# Altium PCB B45160514D.PCBDOC (part 2 of 2)
Units mil, origin at the board's own origin, x right, y up, seen from the top; angles counter-clockwise.
Board outline 6000 x 4000 mil, 2 copper layers (Top Layer, Bottom Layer); 126 components, 91 nets, 371 pads, 466 vias.
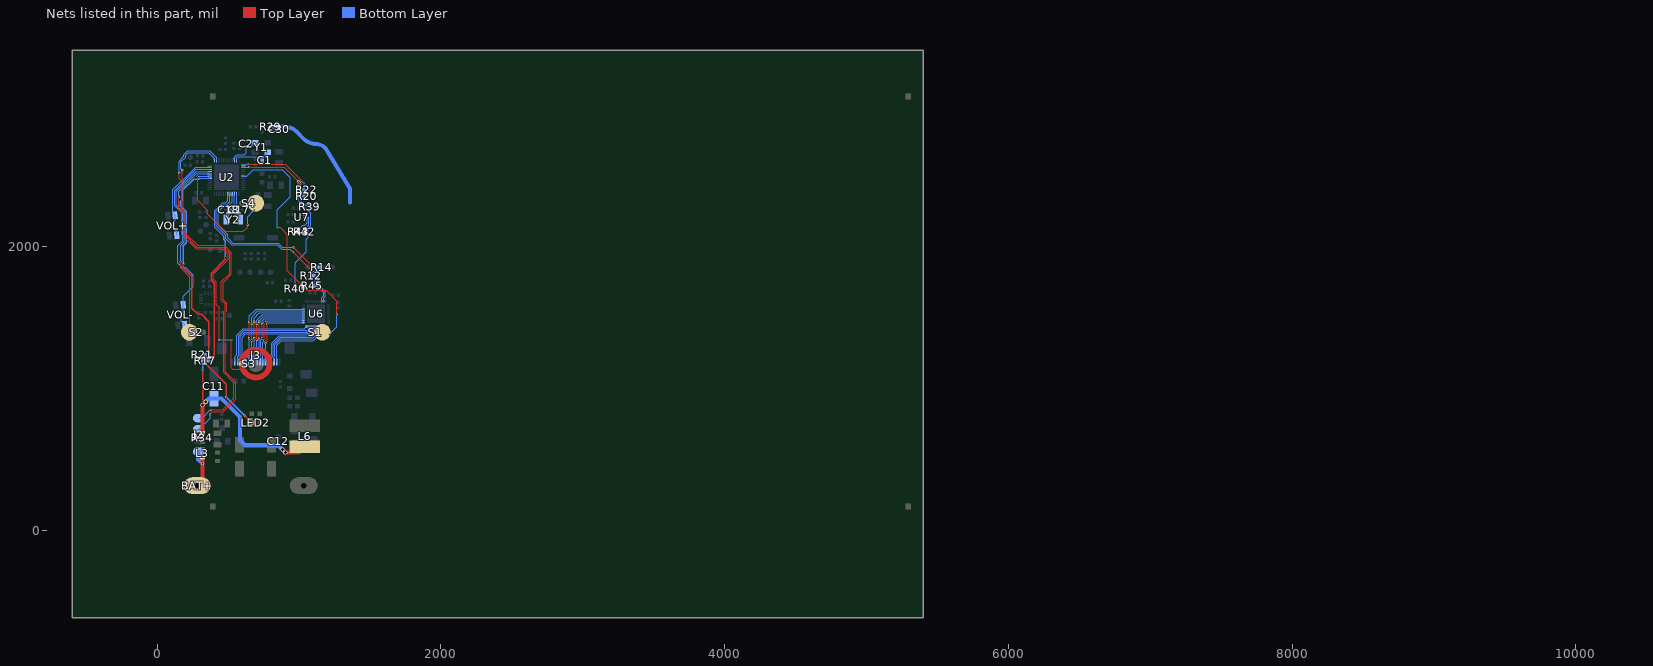
[diagram p2: the nets of this part, all layers, seen from the top]

## Via types
v1: diameter 15, hole 10, Top Layer to Bottom Layer, tented both sides, 447 vias
v2: diameter 30, hole 20, Top Layer to Bottom Layer, tented both sides, 15 vias
v3: diameter 19.68, hole 11.81, Top Layer to Bottom Layer, tented both sides, 4 vias

## Nets (pads, with @x,y where several pads share a name; then routed paths per layer and width w, separated by ;. In a path a pad name is that pad's centre, name@x,y a point inside that pad or via, vN(x,y) a via of type N, cw(c..) or ccw(c..) an arc to the next point about the centre after c; other vN are vias at no path point) (continued)
NetR42_2: R42.2 U7.C3 | length 133.5
  Bottom Layer w6: U7.C3@1034.5,2221.75 1052.25,2221.75 1070,2204 1070,2153 R42.2@1042,2125
NetR43_2: R43.2 U7.B3 | length 135.6
  Bottom Layer w6: R43.2@997,2125 1025,2153 1042,2153 1058,2169 1058,2199 1051,2206 U7.B3@1034.5,2206
RED: LED2.2 U2.18 | length 2131.6
  Top Layer w10: v1(185,1877) 185,1851.7 245,1791.7 245,1566.7 288.71,1523 315,1523 365.3,1472.7 365.3,1227.3 344,1206 344,1174 486.87,1031.13 v1(486.87,939.87) ; v1(615,811.73) LED2.2@668.03,758.7
  Bottom Layer w8: 300.82,2482.13 U2.18@371.89,2482.13
  Bottom Layer w10: v1@185,1878 185,2008 206.3,2029.3 206.3,2245 163.7,2287.6 163.7,2317.01 178.7,2332.01 178.7,2397.01 256.69,2475 293.69,2475 300.82,2482.13 ; v1(486.87,939.87) v1(615,811.73)
RF: C30.1 R29.2 | length 845.8
  Bottom Layer w27.56: R29.2@820,2846 897,2846 cw(c897,2725.29) 982.36,2810.64 1033.64,2759.36 ccw(c1119,2844.71) 1119,2724 cw(c1119,2632.26) 1183.87,2697.13 1359,2412 1359,2312
RSTB: R14.1 U2.4 U6.31 | length 1384.6
  Top Layer w6: v1(961,1996) 1102,1855 v1(1116,1855)
  Bottom Layer w6: U2.4@529.37,2371.89 529.37,2317.37 497,2285 470.19,2285 430,2244.81 430,2151 498,2083 498,2062 534,2026 853,2026 883,1996 v1(961,1996) ; v1(1116,1855) 1137,1855 1137,1730.24 1186,1681.24 1186,1648.24 1175.12,1637.36 U6.31@1175.12,1614.8
RX0: J3.2 U6.11 | length 709.1
  Bottom Layer w6: J3.2@547.96,1187.57 547.96,1222.27 562.7,1237.01 562.7,1377.01 608.7,1423.01 1036.45,1423.01 U6.11@1051.1,1437.66
RX1: J3.3 U6.10 | length 715.6
  Bottom Layer w6: J3.3@567.65,1187.57 567.65,1224.65 574.7,1231.7 574.7,1372.01 612.93,1410.24 1056,1410.24 1064.88,1419.12 U6.10@1064.88,1437.66
RX2: J3.4 U6.9 | length 714.9
  Bottom Layer w6: J3.4@587.33,1187.57 587.34,1367.65 617.93,1398.24 1064,1398.24 1078.66,1412.9 U6.9@1078.66,1437.66
RX3: J3.5 U6.8 | length 720.3
  Bottom Layer w6: J3.5@606.98,1187.57 606.98,1222 599.7,1229.28 599.7,1363.01 622.93,1386.24 1072,1386.24 1092.44,1406.68 U6.8@1092.44,1437.66
RX4: J3.14 U6.7 | length 511.9
  Bottom Layer w6: J3.14@784.15,1187.53 784.15,1219.15 806.7,1241.7 806.7,1319.01 861.7,1374.01 1080.77,1374.01 1106.22,1399.46 U6.7@1106.22,1437.66
RX5: J3.15 U6.6 | length 510
  Bottom Layer w6: J3.15@803.83,1187.53 803.83,1218.83 818.7,1233.7 818.7,1314.01 866.7,1362.01 1086.77,1362.01 1120,1395.24 U6.6@1120,1437.66
RX6: J3.16 U6.5 | length 508.7
  Bottom Layer w6: J3.16@823.52,1187.53 823.52,1221 830.7,1228.18 830.7,1309.01 871.7,1350.01 1093.77,1350.01 1133.78,1390.02 U6.5@1133.78,1437.66
RX7: J3.17 U6.4 | length 506.7
  Bottom Layer w6: J3.17@843.2,1187.53 843.21,1304.21 876.24,1337.24 1099,1337.24 1147.56,1385.8 U6.4@1147.56,1437.66
S1: S1.1 U2.42 | length 1802.4
  Top Layer w6: v1(848,2136) 867,2136 918,2085 918,1830 1055,1693 1190.5,1693 1267,1616.5 v1(1267,1521)
  Bottom Layer w6: U2.42@608.11,2497.87 631.87,2497.87 678,2544.01 882,2544.01 939,2487 939,2351.7 848,2260.7 v1(848,2136) ; v1(1212.5,1382.5) 1267,1437 v1(1267,1521)
S2: S2.1 U2.21 | length 1302.8
  Top Layer w6: v1(165,1894) 165,1851 230.7,1785.3 230.7,1449.3 S2.1@235,1445
  Bottom Layer w6: v1(165,1894) 165,2008.31 192,2035.31 192,2237.91 136,2293.91 136,2391.31 274.07,2529.37 U2.21@371.89,2529.37
S3: S3.2 U2.20 | length 1993.1
  Top Layer w6: v1(154,2352) 154,2263 174.7,2242.3 174.7,2085.3 275,1985 462.71,1985 500,1947.7 500,1910 394.7,1804.7 394.7,1771.01 417.7,1748.01 417.7,1592.54 436.5,1573.74 v1(436.5,1342.74) ; v1(524,1342.74) 524,1146 534,1136 597,1136
  Bottom Layer w6: v1(154,2352) 154,2392 275.62,2513.62 U2.20@371.89,2513.62 ; v1(436.5,1342.74) v1(524,1342.74)
S4: S4.1 U2.19 | length 867.2
  Top Layer w6: v1(285,2494) 285,2327 358,2254 358,2230 480,2108 609,2108 639,2138 v1(639,2154)
  Bottom Layer w6: v1(285,2494) 288.87,2497.87 U2.19@371.89,2497.87 ; v1(639,2154) 639,2212 v1(686,2259)
SWDCLK: J2.2 U2.25 | length 2665.5
  Top Layer w6: v1(177,2539) 177,2474 185,2466 185,2267.7 199.3,2253.41 199.3,2094.7 285,2009 472.54,2009 524.3,1957.24 524.3,1805.61 466,1747.31 466,1627.7 492.23,1601.48 492.23,1550 480.87,1538.65 480.87,1119.13 554,1046 554,925.31 464.69,836 390,836 v1(373,819)
  Bottom Layer w6: v1(177,2539) 168,2548 168,2598.31 201,2631.31 201,2644.31 219.69,2663 364.91,2663 403.39,2624.52 U2.25@403.39,2608.11 ; J2.2@294.61,713.61 373,792 v1(373,819)
SWDIO: J2.1 U2.26 | length 2646.4
  Top Layer w6: v1(156,2519) 156,2477.7 172.3,2461.41 172.3,2262.7 187,2248 187,2089.88 279.95,1996.94 467.77,1996.94 512,1952.7 512,1810.31 453.7,1752.01 453.7,1623.01 480.21,1596.49 480.21,1555.05 468.81,1543.65 468.81,1114.19 542,1041 542,930.31 461.7,850.01 v1(376,850.01)
  Bottom Layer w6: v1(156,2519) 156,2604 188.75,2636.75 188.75,2649.06 214.69,2675 370,2675 419.13,2625.87 U2.26@419.13,2608.11 ; J2.1@291.94,792.35 318.35,792.35 v1(376,850.01)
T_I2C_SCL: R20.2 R39.2 U2.37 | length 685.5
  Top Layer w6: v1(641,2582) 902,2582 1012,2472 v1(1012,2444)
  Bottom Layer w6: U2.37@608.11,2576.61 635.61,2576.61 v1(641,2582) ; 1012,2355 R20.2@1036,2355 ; v1(1012,2444) 1012,2324.7 1043.27,2293.43 R39.2@1061.56,2293.43
T_I2C_SDA: R22.2 R40.2 U2.38 | length 1339.4
  Top Layer w6: v1(649,2560.87) 895.13,2560.87 v1(995,2461)
  Bottom Layer w6: U2.38@608.11,2560.87 v1(649,2560.87) ; R40.2@975,1724 975,1888.7 1051.7,1965.4 1051.7,2051.09 1065.7,2065.09 1065.7,2131.4 1082.7,2148.4 1082.7,2237.01 995,2324.7 v1(995,2461) 1021,2461 1036,2446 R22.2@1036,2400
"TOUCH INT": R12.1 R45.1 U2.5 U6.30 | length 1355.1
  Top Layer w6: v1(957.22,1962.78) v1@1101.5,1818.5
  Bottom Layer w6: U2.5@513.62,2371.89 513.62,2318.5 492.13,2297 465.22,2297 417.7,2249.48 417.7,2146.33 485,2079.03 485,2055 526,2013.99 847.71,2013.99 878.71,1983 937,1983 v1(957.22,1962.78) ; v1(1104,1821) R12.1@1104,1795 1114,1785 1114,1735.7 1174,1675.7 1174,1653.31 1161.34,1640.64 U6.30@1161.34,1614.8
TX0: J3.13 U6.12 | length 533.4
  Top Layer w6: v1(764.46,1320) 775,1330.54 v1(775,1458)
  Bottom Layer w6: J3.13@764.46,1187.53 v1(764.46,1320) ; v1@775,1459 780.23,1464.23 U6.12@1031.42,1464.21
TX1: J3.12 U6.13 | length 564.7
  Top Layer w6: v1(757,1340) v1(757,1469)
  Bottom Layer w6: J3.12@744.74,1187.53 744.74,1327.74 v1(757,1340) ; v1(757,1469) 766.01,1478.01 U6.13@1031.42,1477.99
TX2: J3.11 U6.14 | length 593.2
  Top Layer w6: v1(740,1353) v1(740,1455)
  Bottom Layer w6: J3.11@725.09,1187.57 725.09,1223.09 732,1230 732,1345 v1(740,1353) ; v1(740,1455) 740,1477 754.79,1491.79 U6.14@1031.42,1491.77
TX3: J3.10 U6.15 | length 619.5
  Top Layer w6: v1(719,1357) v1@719,1471
  Bottom Layer w6: J3.10@705.41,1187.57 705.41,1220.41 719,1234 v1(719,1357) ; v1(720,1471) 720,1479 746.57,1505.57 U6.15@1031.42,1505.57
TX4: J3.9 U6.16 | length 644.5
  Top Layer w6: v1(702,1343) v1@702,1455
  Bottom Layer w6: J3.9@685.72,1187.57 685.72,1222.72 702,1239 v1(702,1343) ; v1(702,1456) 702,1481 740.35,1519.35 U6.16@1031.42,1519.33
TX5: J3.8 U6.17 | length 678.7
  Top Layer w6: v1(684.7,1356) v1(684.7,1471)
  Bottom Layer w6: J3.8@666.04,1187.57 666.04,1221.04 684.7,1239.7 v1(684.7,1356) ; v1(684.7,1471) 684.7,1496.7 721.13,1533.13 U6.17@1031.42,1533.11
TX6: J3.7 U6.18 | length 706.6
  Top Layer w6: v1(667,1339) v1(667,1456)
  Bottom Layer w6: J3.7@646.35,1187.57 646.35,1220.35 667,1241 v1(667,1339) ; v1(667,1456) 667,1503 710.91,1546.91 U6.18@1031.42,1546.89
TX7: J3.6 U6.19 | length 736.3
  Top Layer w6: v1(649,1355) v1(649,1470)
  Bottom Layer w6: J3.6@626.67,1187.57 626.67,1217.68 649,1240 v1(649,1355) ; v1(649,1470) 649,1512 697.69,1560.69 U6.19@1031.42,1560.67
VCC: C11.1 C12.1 L6.1 R17.1 R34.1 | length 1568.3
  Top Layer w10: v2(320,885) v2@321,884 ; v1(321,1131) 321,926.52 v2@341.32,906.2
  Top Layer w30: R34.1@320,685 v2(320,885) v2(342.68,907.68) ; v2(883.66,570.34) v2(904,550) 998.82,550 L6.1@1040,591.18
  Bottom Layer w10: v1(321,1131) R17.1@321,1195
  Bottom Layer w30: v2(320,885) 365.35,930.35 453.65,930.35 585,799 585,636 621,600 854,600 v2(904,550)
VDD: BAT+.1 J2.4 L3.2 | length 325.3
  Top Layer w30: BAT+.1@282.2,316.26 305.06,316.3 320,331.24 L3.2@320,515
  Bottom Layer w30: J2.4@290,556.13 290,501 v3(320,471)
VOL+: U2.23 VOL+.3 VOL+.4 | length 668.7
  Bottom Layer w6: VOL+.3@138.67,2080.87 138.67,2108.33 114,2133 114,2173 126.32,2185.32 VOL+.4@126.32,2222.07 111.3,2237.08 111.3,2401.3 270.87,2560.87 U2.23@371.89,2560.87
VOL-: U2.22 VOL-.3 VOL-.4 | length 1395.4
  Bottom Layer w6: VOL-.3@195.67,1450.87 172,1474.54 172,1543 183.32,1554.32 183.32,1650.32 255,1722 255,1799 198,1856 175,1856 146,1885 146,2006.31 179.7,2040.01 179.7,2233.3 123.3,2289.7 123.3,2395.61 272.81,2545.12 U2.22@371.89,2545.12
VOLTAGE: R17.2 R21.2 U2.6 | length 1396.4
  Top Layer w10: v1(385,1196.24) 403.7,1214.94 403.7,1742.01 380,1765.7 380,1810.25 482,1912.25 v1(482,1927)
  Bottom Layer w6: 469,2075 405.7,2138.3 405.7,2255.01 462,2311.3 484.3,2311.3 497.87,2324.87 U2.6@497.87,2371.89
  Bottom Layer w10: R21.2@339,1240 359,1220 R17.2@359,1195 ; R17.2@360.24,1196.24 v1(385,1196.24) ; 469,2075 469,2051 482,2038 v1(482,1927)
XC1: C1.1 U2.35 Y1.1 | length 290
  Bottom Layer w6: U2.35@560.87,2608.11 560.87,2630.87 565,2635 716,2635 C1.1@741,2610 741,2631 776.54,2666.54 Y1.1@780.28,2666.54
XC2: C2.1 U2.34 Y1.2 | length 234.6
  Bottom Layer w6: U2.34@545.12,2608.11 545.12,2632.12 560,2647 616,2647 630,2661 630,2702 637,2709 665.26,2709 Y1.2@689.72,2733.46
XL1: C17.1 U2.2 Y2.1 | length 191
  Bottom Layer w6: U2.2@560.87,2371.89 560.87,2233.13 585.21,2208.79 Y2.1@585.21,2191
XL2: C18.1 U2.3 Y2.2 | length 177.8
  Bottom Layer w6: Y2.2@497,2214 523,2240 523,2258 545.12,2280.12 U2.3@545.12,2371.89
pads on no net: MARK1.1 MARK1.4 MARK2.1 MARK2.4 MARK3.1 MARK3.4 MARK4.1 MARK4.4 MARK5.1 MARK5.4 MARK6.1 MARK6.4 MARK7.1 MARK7.4 MARK8.1 MARK8.4 U2.11 U2.12 U2.29 U2.39 U2.40 U2.43 U2.44 U4.2 U4.3 U4.9 U4.10 U4.11 U4.12 U6.0@1009.76,1505.55 U6.0@1009.76,1574.45 U6.0@1064.88,1415.98 U6.0@1092.44,1636.46 U6.0@1133.78,1415.98 U6.0@1161.34,1636.46 U6.0@1230.24,1491.77 U6.0@1230.24,1560.67 U6.1 U6.2 U6.3 U6.35 U6.36 U6.37 U6.38 U6.39 U6.40 U6.41 U6.42 U7.A3

## Polygon pours and split planes (outlines as drawn)
GND on Top Layer "Top Layer-GND" (hatched 45Degree grid 40 track 6, remove dead copper, pour order 1000): 853,1745 1332,1745 1332,1092 517,1092 380.66,1228.34 380.66,1355.84 769.82,1745
GND on Top Layer "GND" (solid, remove dead copper, pour order 1000): 650,2992 649,2991 388,2991 0,2603 -5,2598 -5,238 -6,237 1191,237 1192,238 1190,240 1190,874 1264,948 1261,951 1261,1103 962.25,1103 955.12,1110.13 954.99,1110 884.09,1110 878.14,1104.05 507.95,1104.05 381,1231 370,1242 370,1354 390,1354 617,1581 763,1727 1406,1727 1406,2613 1027,2992
GND on Bottom Layer "bot Layer-GND" (hatched 90Degree grid 40 track 5.98, remove dead copper, pour order 1000): 865,1747 1344,1747 1344,1094 529,1094 392.66,1230.34 392.66,1357.84 781.82,1747
GND on Bottom Layer "GND" (solid, remove dead copper, pour order 1001): 650,2992 649,2991 388,2991 0,2603 -5,2598 -5,238 -6,237 1191,237 1192,238 1190,240 1190,874 1264,948 1261,951 1261,1103 962.25,1103 955.12,1110.13 954.99,1110 884.09,1110 878.14,1104.05 507.95,1104.05 381,1231 370,1242 370,1354 390,1354 617,1581 763,1727 1406,1727 1406,2613 1027,2992

## Keep-outs
Bottom Layer:
  circle w5: c183.13,1759.5 r59.05
  circle w5: c1208.02,1759.5 r59.05
Keep-Out Layer:
  circle w5: c4480.42,1759.5 r35.43
  circle w5: c5505.31,1759.5 r35.43
  circle w5: c3047.99,1759.5 r35.43
  circle w5: c4072.88,1759.5 r35.43
  circle w5: c1615.56,1759.5 r35.43
  circle w5: c2640.45,1759.5 r35.43
  circle w5: c1208.02,1759.5 r35.43
  circle w5: c183.13,1759.5 r35.43
  circle w5: c5492.15,3109.69 r59.06
  circle w5: c196.85,3109.68 r59.06
  circle w5: c5492.15,118.14 r59.06
  circle w5: c196.85,118.13 r59.06
  circle w5: c183.13,1759.5 r35.43
  circle w5: c1208.02,1759.5 r35.43
  circle w5: c183.13,1759.5 r35.43
  circle w5: c1208.02,1759.5 r35.43
  lines w5: 49.06,2159.45 73.19,2162.14 ; 51.87,2128.31 76,2131 ; 106.06,1529.45 130.19,1532.14 ; 108.87,1498.31 133,1501 ; 120.59,1368.61 44.36,2212.63 ; 201.2,2991.58 1191.07,2991.58 ; 799,2991.58 5689,2991.58 5689,3188.45 ccw(c5649.63,3188.45) 5649.63,3227.82 4772.23,3227.82 39.37,3227.8 ccw(c39.37,3188.43) 0,3188.43 0,2991.57 4861.83,2991.57 ; 827.17,236.25 5689,236.25 5689,39.38 cw(c5649.63,39.38) 5649.63,0.01 916.77,0.01 39.37,0 cw(c39.37,39.37) 0,39.37 0,236.24 4890,236.24 ; 1478.56,2193.04 1479.97,2177.35 ; 1480.15,2175.39 1480.33,2173.43 ; 1480.86,2167.55 1481.28,2162.84 ; 1484.68,2125.2 1485.11,2120.5 ; 1485.64,2114.61 1485.82,2112.65 ; 1485.99,2110.69 1487.41,2095.01 ; 1633.06,236.24 2622.94,236.24 ; 1633.63,2991.58 2623.5,2991.58 ; 1720,236.24 2622.94,236.24 ; 2910.99,2193.04 2912.4,2177.35 ; 2912.58,2175.39 2912.76,2173.43 ; 2913.29,2167.55 2913.72,2162.84 ; 2917.12,2125.2 2917.54,2120.5 ; 2918.07,2114.61 2918.25,2112.65 ; 2918.43,2110.69 2919.84,2095.01 ; 3065.5,236.24 4055.37,236.24 ; 3066.06,2991.58 4055.94,2991.58 ; 3129,236.24 4055.37,236.24 ; 4343.42,2193.04 4344.84,2177.35 ; 4345.01,2175.39 4345.19,2173.43 ; 4345.72,2167.55 4346.15,2162.84 ; 4349.55,2125.2 4349.97,2120.5 ; 4350.5,2114.61 4350.68,2112.65 ; 4350.86,2110.69 4352.27,2095.01 ; 4497.93,236.24 5487.8,236.24 ; 4566,236.24 5487.8,236.24 ; 44.36,2212.63 44.36,2212.64 ; 44.36,2212.63 99.37,2568.75 ; 44.36,2212.63 131.4,1248.88 183.76,1248.88 cw(c183.76,1176.04) 183.76,1103.21 153.25,1103.21 169.8,919.93 ; 44.36,2212.63 99.37,2568.75 ; 44.36,2212.63 44.36,2212.64 ; 44.36,2212.64 44.36,2212.64 ; 44.36,2212.64 44.36,2212.64 ; 99.37,2568.75 190,2716.72 ; 99.37,2568.75 190,2716.72 ; 169.8,919.93 ccw(c189.41,921.7) 185.18,902.47 ; 169.8,919.93 ccw(c189.41,921.7) 185.18,902.47 ; 169.8,919.93 ccw(c189.41,921.7) 185.18,902.47 ; 169.8,919.93 154.24,1092.19 169.8,919.93 ; 177.01,236.24 177.01,413.4 ; 177.01,236.24 1190.51,236.24 ; 177.01,236.24 177.01,413.4 ; 177.01,236.24 1190.51,236.24 ; 177.01,236.24 1190.51,236.24 ; 177.01,236.24 177.01,413.4 ; 177.01,413.4 ccw(c161.26,449.49) 200.63,449.49 ; 177.01,413.4 ccw(c161.26,449.49) 200.63,449.49 ; 177.01,413.41 ccw(c161.26,449.49) 200.63,449.49 ; 177.01,413.4 ccw(c161.26,449.49) 200.63,449.49 ; 185.18,902.47 cw(c180.95,883.25) 200.63,883.25 ; 185.18,902.47 cw(c180.95,883.25) 200.63,883.25 ; 185.18,902.47 cw(c180.95,883.25) 200.63,883.25 ; 190,2716.72 cw(c257.15,2675.6) 266.96,2753.72 ; 190,2716.72 cw(c257.15,2675.6) 266.96,2753.72 ; 200.63,236.24 1190.51,236.24 ; 200.63,236.24 1190.51,236.24 ; 200.63,236.24 1190.51,236.24 ; 200.63,236.24 1190.51,236.24 ; 200.63,449.49 200.63,883.25 ; 200.63,449.49 200.63,883.25 ; 200.63,449.49 200.63,883.25 ; 266.96,2753.72 ccw(c278.98,2849.43) 375.43,2849.43 375.43,2912.97 cw(c454.17,2912.97) 454.17,2991.71 616.14,2991.71 cw(c616.14,2972.02) 635.05,2977.48 ccw(c695.57,2994.94) 756.1,2977.48 cw(c775.01,2972.02) 775.01,2991.71 936.97,2991.71 cw(c936.97,2912.97) 1015.71,2912.97 1015.71,2849.43 ccw(c1112.17,2849.43) 1124.19,2753.72 ; 266.96,2753.72 ccw(c278.98,2849.43) 374.94,2859.2 cw(c278.98,2849.43) 266.96,2753.72 ; 480.16,1665.07 480.16,1714.29 ; 480.16,1665.07 910.98,1665.07 ; 480.16,1665.07 910.98,1665.07 ; 480.16,1665.07 480.16,1714.29 ; 480.16,1665.07 910.98,1665.07 ; 480.16,1665.07 480.16,1714.29 ; 480.16,1714.29 910.98,1714.29 ; 480.16,1714.29 910.98,1714.29 ; 480.16,1714.29 910.98,1714.29 ; 635.05,2977.48 ccw(c695.57,2994.94) 756.1,2977.48 ; 635.05,2977.48 ccw(c616.14,2972.02) 613.77,2991.57 cw(c616.14,2972.02) 635.05,2977.48 ; 635.05,2977.48 ccw(c695.57,2994.94) 756.1,2977.48 ; 756.1,2977.48 cw(c775.01,2972.02) 777.38,2991.57 ccw(c775.01,2972.02) 756.1,2977.48 ; 910.98,1665.07 910.98,1714.29 ; 910.98,1665.07 910.98,1714.29 ; 910.98,1665.07 910.98,1714.29 ; 1124.19,2753.72 cw(c1134,2675.6) 1201.14,2716.72 ; 1124.19,2753.72 cw(c1112.17,2849.43) 1016.21,2859.2 ccw(c1112.17,2849.43) 1124.19,2753.72 ; 1124.19,2753.72 cw(c1134,2675.6) 1201.14,2716.72 ; 1190.51,236.24 1190.51,883.25 ; 1190.51,236.24 1190.51,883.25 ; 1190.51,236.24 1190.51,883.25 ; 1190.51,236.24 1190.51,883.25 ; 1190.51,883.25 cw(c1210.2,883.25) 1205.97,902.47 ; 1190.51,883.25 cw(c1210.2,883.25) 1205.97,902.47 ; 1190.51,883.25 cw(c1210.2,883.25) 1205.97,902.47 ; 1201.14,2716.72 1379.86,2424.94 ; 1201.14,2716.72 1379.86,2424.94 ; 1205.97,902.47 ccw(c1201.74,921.7) 1221.35,919.93 ; 1205.97,902.47 ccw(c1201.74,921.7) 1221.35,919.93 ; 1205.97,902.47 ccw(c1201.74,921.7) 1221.35,919.93 ; 1221.35,919.93 1236.9,1092.19 1221.35,919.93 ; 1221.35,919.93 1237.9,1103.21 1207.38,1103.21 cw(c1207.38,1176.04) 1207.38,1248.88 1298.49,1248.88 1388.45,2244.92 ; 1379.86,2424.94 cw(c1363.08,2414.66) 1382.51,2417.77 ; 1379.86,2424.94 cw(c1363.08,2414.66) 1382.51,2417.77 ; 1379.86,2424.94 cw(c1363.08,2414.66) 1382.51,2417.77 ; 1382.51,2417.77 cw(c694.43,2307.6) 1388.45,2244.92 ; 1382.51,2417.77 cw(c694.43,2307.6) 1388.45,2244.92 ; 1382.51,2417.77 cw(c694.43,2307.6) 1388.45,2244.92 ; 1388.45,2244.92 1298.72,1251.37 1388.45,2244.92 ; 1476.79,2212.63 1563.83,1248.88 1616.19,1248.88 cw(c1616.19,1176.04) 1616.19,1103.21 1585.68,1103.21 1602.23,919.93 ccw(c1621.84,921.7) 1617.61,902.47 cw(c1613.38,883.25) 1633.06,883.25 1633.06,449.49 ; 1476.79,2212.63 1531.8,2568.75 1622.43,2716.72 cw(c1689.58,2675.6) 1699.39,2753.72 ccw(c1711.41,2849.43) 1807.86,2849.43 1807.86,2912.97 cw(c1886.6,2912.97) 1886.6,2991.71 2048.57,2991.71 cw(c2048.57,2972.02) 2067.48,2977.48 ccw(c2128,2994.94) 2188.53,2977.48 cw(c2207.44,2972.02) 2207.44,2991.71 2369.4,2991.71 cw(c2369.4,2912.97) 2448.14,2912.97 2448.14,2849.43 ccw(c2544.6,2849.43) 2556.62,2753.72 cw(c2566.43,2675.6) 2633.58,2716.72 2812.29,2424.94 cw(c2795.51,2414.66) 2814.94,2417.77 cw(c2126.86,2307.6) 2820.88,2244.92 2730.92,1248.88 2639.81,1248.88 ccw(c2639.81,1176.04) 2639.81,1103.21 2670.33,1103.21 2653.78,919.93 cw(c2634.17,921.7) 2638.4,902.47 ccw(c2642.63,883.25) 2622.94,883.25 2622.94,236.24 ; 1476.79,2212.63 1476.79,2212.64 ; 1476.79,2212.64 1476.79,2212.64 ; 1609.44,236.24 2622.94,236.24 ; 1609.44,236.24 1609.44,413.41 ; 1609.44,236.24 1609.44,413.41 ; 1609.44,413.41 ccw(c1593.69,449.49) 1633.06,449.49 ; 1609.44,413.41 ccw(c1593.69,449.49) 1633.06,449.49 ; 2909.22,2212.63 2996.26,1248.88 3048.62,1248.88 cw(c3048.62,1176.04) 3048.62,1103.21 3018.11,1103.21 3034.66,919.93 ccw(c3054.27,921.7) 3050.04,902.47 cw(c3045.81,883.25) 3065.5,883.25 3065.5,449.49 ; 2909.22,2212.63 2964.23,2568.75 3054.86,2716.72 cw(c3122.01,2675.6) 3131.82,2753.72 ccw(c3143.84,2849.43) 3240.29,2849.43 3240.29,2912.97 cw(c3319.03,2912.97) 3319.03,2991.71 3481,2991.71 cw(c3481,2972.02) 3499.91,2977.48 ccw(c3560.43,2994.94) 3620.96,2977.48 cw(c3639.87,2972.02) 3639.87,2991.71 3801.83,2991.71 cw(c3801.83,2912.97) 3880.57,2912.97 3880.57,2849.43 ccw(c3977.03,2849.43) 3989.05,2753.72 cw(c3998.86,2675.6) 4066.01,2716.72 4244.72,2424.94 cw(c4227.94,2414.66) 4247.37,2417.77 cw(c3559.29,2307.6) 4253.31,2244.92 4163.35,1248.88 4072.25,1248.88 ccw(c4072.25,1176.04) 4072.25,1103.21 4102.76,1103.21 4086.21,919.93 cw(c4066.6,921.7) 4070.83,902.47 ccw(c4075.06,883.25) 4055.37,883.25 4055.37,236.24 ; 2909.22,2212.63 2909.22,2212.64 ; 2909.22,2212.64 2909.22,2212.64 ; 3041.87,236.24 4055.37,236.24 ; 3041.87,236.24 3041.87,413.41 ; 3041.87,236.24 3041.87,413.41 ; 3041.87,413.41 ccw(c3026.13,449.49) 3065.5,449.49 ; 3041.87,413.41 ccw(c3026.13,449.49) 3065.5,449.49 ; 4341.65,2212.63 4428.69,1248.88 4481.05,1248.88 cw(c4481.05,1176.04) 4481.05,1103.21 4450.54,1103.21 4467.09,919.93 ccw(c4486.7,921.7) 4482.47,902.47 cw(c4478.24,883.25) 4497.93,883.25 4497.93,449.49 ; 4341.65,2212.63 4396.66,2568.75 4487.29,2716.72 cw(c4554.44,2675.6) 4564.25,2753.72 ccw(c4576.27,2849.43) 4672.73,2849.43 4672.73,2912.97 cw(c4751.47,2912.97) 4751.47,2991.71 4913.43,2991.71 cw(c4913.43,2972.02) 4932.34,2977.48 ccw(c4992.86,2994.94) 5053.39,2977.48 cw(c5072.3,2972.02) 5072.3,2991.71 5234.26,2991.71 cw(c5234.26,2912.97) 5313,2912.97 5313,2849.43 ccw(c5409.46,2849.43) 5421.48,2753.72 cw(c5431.29,2675.6) 5498.44,2716.72 5677.15,2424.94 cw(c5660.37,2414.66) 5679.81,2417.77 cw(c4991.72,2307.6) 5685.74,2244.92 5595.78,1248.88 5504.68,1248.88 ccw(c5504.68,1176.04) 5504.68,1103.21 5535.19,1103.21 5518.64,919.93 cw(c5499.03,921.7) 5503.26,902.47 ccw(c5507.49,883.25) 5487.8,883.25 5487.8,236.24 ; 4341.65,2212.63 4341.65,2212.64 ; 4341.65,2212.64 4341.65,2212.64 ; 4474.3,236.24 5487.8,236.24 ; 4474.3,236.24 4474.3,413.4 ; 4474.3,236.24 4474.3,413.4 ; 4474.3,413.4 ccw(c4458.56,449.49) 4497.93,449.49 ; 4474.3,413.4 ccw(c4458.56,449.49) 4497.93,449.49 ; 46.13,2193.04 47.54,2177.35 46.13,2193.04 ; 47.72,2175.39 47.9,2173.43 47.72,2175.39 ; 48.43,2167.55 48.85,2162.84 48.43,2167.55 ; 52.25,2125.2 52.68,2120.5 52.25,2125.2 ; 53.21,2114.61 53.39,2112.65 53.21,2114.61 ; 53.56,2110.69 54.98,2095.01 53.56,2110.69 ; 1912.59,1665.07 2343.41,1665.07 2343.41,1714.29 1912.59,1714.29 1912.59,1665.07 ; 3345.03,1665.07 3775.84,1665.07 3775.84,1714.29 3345.03,1714.29 3345.03,1665.07 ; 4498.49,2991.58 5488.37,2991.58 4498.49,2991.58 ; 4777.46,1665.07 5208.27,1665.07 5208.27,1714.29 4777.46,1714.29 4777.46,1665.07

## Other copper
Top Layer:
  pour cut-out: 744,774.5 744,805.5 726,805.5 726,774.5
  pour cut-out: 710.09,755.15 679.09,755.15 679.09,737.15 710.09,737.15
  pour cut-out: 680.91,825.85 711.91,825.85 711.91,843.85 680.91,843.85
  pour cut-out: 916.05,237.56 1152.27,237.56 1152.27,395.04 916.05,395.04
  pour cut-out: 124.72,217.87 439.68,217.87 439.68,414.72 124.72,414.72
  pour cut-out: 291.1,1690.29 291.1,1572.18 428.9,1572.18 428.9,1690.29
  pour cut-out: 880,2851 880,2745 880,2732 1192,2359 1193,1921 1360,1919 1420,1919 1417,2518 953,3033 880,3032
  pour cut-out: 691.49,1244.6 653.49,1241.6 622.49,1193.6 622.49,1136.6 727.49,1092.6 776.49,1205.6 710.49,1244.6
  pour cut-out: 1158.03,1482.75 1111,1478 1083.4,1416.73 1079,1387 1090.99,1358.03 1130.24,1313.32 1195.99,1314.03 1247,1354 1244.99,1427.03 1204,1481
  pour cut-out: 689.53,2391.95 642.5,2387.19 614.9,2325.92 610.5,2296.19 622.49,2267.23 661.74,2222.51 727.49,2223.23 778.5,2263.19 776.49,2336.23 735.5,2390.19
  pour cut-out: 221.04,1482.72 179,1462 160,1440 151,1415 150,1384 160,1352 193.25,1313.28 259,1314 310.01,1353.97 308,1427 267.01,1480.97
  pour cut-out: 518.09,943.15 487.09,943.15 487.09,925.15 518.09,925.15
  pour cut-out: 1117.09,1849.15 1086.09,1849.15 1086.09,1831.15 1117.09,1831.15
  pour cut-out: 727.35,937.62 758.35,937.62 758.35,955.62 727.35,955.62
  pour cut-out: 602.12,824.88 633.12,824.88 633.12,842.88 602.12,842.88
Bottom Layer:
  pour cut-out: 213.01,1559.68 213.01,1528.68 195.01,1528.68 195.01,1559.68
  pour cut-out: 217.72,1513.24 217.72,1482.24 199.72,1482.24 199.72,1513.24
  pour cut-out: 730.09,1938.33 730.09,1969.33 748.09,1969.33 748.09,1938.33
  pour cut-out: 636.09,1938.33 636.09,1969.33 654.09,1969.33 654.09,1938.33
  pour cut-out: 161.62,2030.1 161.62,2061.1 179.62,2061.1 179.62,2030.1
  pour cut-out: 274.96,766.74 274.96,735.74 256.96,735.74 256.96,766.74
  pour cut-out: 442.55,1578.39 411.55,1578.39 411.55,1596.39 442.55,1596.39
  pour cut-out: 457.28,1649.24 426.28,1649.24 426.28,1667.24 457.28,1667.24
  pour cut-out: 996,1687 1027,1687 1027,1705 996,1705
  pour cut-out: 687.59,2367.09 656.59,2367.09 656.59,2349.09 687.59,2349.09
  pour cut-out: 599.91,2690.89 630.91,2690.89 630.91,2708.89 599.91,2708.89
  pour cut-out: 556.91,2690.91 587.91,2690.91 587.91,2708.91 556.91,2708.91
  pour cut-out: 404,2629 349,2578 350,2393 399,2353 587,2352 629,2395 629,2591 582,2630
  pour cut-out: 660.2,2759.06 815,2759 818,2641 659,2635
  pour cut-out: 461.2,2232.34 461.2,2149.66 610.8,2149.66 610.8,2232.34
  pour cut-out: 916.05,237.56 1152.27,237.56 1152.27,395.04 916.05,395.04
  pour cut-out: 989.22,2235.53 989.22,2176.47 1048.28,2176.47 1048.28,2235.53
  pour cut-out: 124.72,217.87 530,216 530,415 124.72,414.72
  pour cut-out: 291.1,1690.29 291.1,1572.18 428.9,1572.18 428.9,1690.29
  pour cut-out: 1013.7,1632.54 1013.7,1419.94 1226.3,1419.94 1226.3,1632.54
  pour cut-out: 880,2851 880,2745 880,2732 1192,2359 1193,1921 1360,1919 1420,1919 1417,2518 953,3033 880,3032
  pour cut-out: 781.91,2850.08 812.91,2850.08 812.91,2868.08 781.91,2868.08
  pour cut-out: 812.83,2850.08 843.83,2850.08 843.83,2868.08 812.83,2868.08
  pour cut-out: 843.74,2850.08 874.74,2850.08 874.74,2868.08 843.74,2868.08
  pour cut-out: 859.15,2850.08 890.15,2850.08 890.15,2868.08 859.15,2868.08
  pour cut-out: 781.91,2841.92 812.91,2841.92 812.91,2823.92 781.91,2823.92
  pour cut-out: 797.33,2841.92 828.33,2841.92 828.33,2823.92 797.33,2823.92
  pour cut-out: 812.83,2841.92 843.83,2841.92 843.83,2823.92 812.83,2823.92
  pour cut-out: 828.24,2841.92 859.24,2841.92 859.24,2823.92 828.24,2823.92
  pour cut-out: 843.74,2841.92 874.74,2841.92 874.74,2823.92 843.74,2823.92
  pour cut-out: 859.15,2841.92 890.15,2841.92 890.15,2823.92 859.15,2823.92
  pour cut-out: 592,2987 604,2949 626,2918 649,2905 680,2897 711,2897 739,2904 756,2913 773,2928 784,2948 794,2967 801,2996 797,3011 588,3010
  pour cut-out: 821.91,2399.09 850.09,2399.09 850.09,2452.85 819,2456
  pour cut-out: 187,1851.5 187,1820.5 169,1820.5 169,1851.5
  pour cut-out: 385.59,1980 416.59,1980 416.59,1962 385.59,1962
  pour cut-out: 312.37,2143.72 343.37,2143.72 343.37,2125.72 312.37,2125.72
  pour cut-out: 1103.78,1845.08 1072.78,1845.08 1072.78,1863.08 1103.78,1863.08
  pour cut-out: 818.37,2590.32 818.37,2629.69 755.38,2629.69 755.38,2590.32
  pour cut-out: 649.69,2784.37 610.31,2784.37 610.31,2721.38 649.69,2721.38
  pour cut-out: 446.63,2278.69 446.63,2239.32 509.62,2239.32 509.62,2278.69
  pour cut-out: 617.69,2298.37 578.32,2298.37 578.32,2235.38 617.69,2235.38
  pour cut-out: 1241.38,1816.14 1210.38,1816.14 1210.38,1834.14 1241.38,1834.14

## Silkscreen, mask and mechanical layers (free items; w line width, h text height)
Top Overlay:
  text "B45160514D" at 2042.87,3128.13 h80
  text "9NC:5.1.9.002623" at 1999.88,3073.13 h80
  text "B45160514D" at 3254.87,139.13 h80
  text "9NC:5.1.9.002623" at 3211.88,84.13 h80
Bottom Overlay:
  circle w5: c695.59,829.57 r216.54
  lines w5: 441,394.95 441,534 602,534 602,394.95 441,394.95
  text "B45160514D" at 1280,2429 h80 r315
  text "9NC:5.1.9.002623" at 1309,2309 h80 r315
  text "SWDIO" at 584,501 h40
  text "SWDCLK" at 587,471 h40
  text "GND" at 584,440 h40
  text "VDD" at 589,405 h40
  text "BAT+" at 564,298 h60
  text "BAT-" at 864,283 h60
Mechanical 1:
  drawing of 385 lines, arcs and shapes, not listed
Mechanical 2:
  drawing of 2454 lines, arcs and shapes, not listed
Mechanical 3:
  lines w5: 166.52,2315.46 312.01,2583.32 401.78,2612.94 472.23,2668.91 502.87,2782.78 571.79,2811.77 627.58,2778.24 806,2778.24 847,2819.24 970,2819.24 970,2863.24 997,2863.24 1408,2863.24 1408,209.24 37,209.24 37,2289.24 166.5,2315.52 ; 391,1239.24 391,1367.24 780,1756.24 1342,1756.24 1342,1103.24 527,1103.24 391,1239.24
Drill Drawing:
  text ".Legend" at 6718,2975.24 h60

## Text inside footprints (layer, text, board x,y; h text height)
C11: Bottom Overlay "+" at 374,863 h60 r90
C13: Top Overlay "+" at 831,677 h60 r90
C14: Top Overlay "+" at 612,680 h60 r90
Designator10: Top Overlay "2" at 9020,1510 h60; Top Overlay "1.6mm" at 9020.01,1400 h60; Top Overlay "35uM" at 9020,1280 h60; Top Overlay "non" at 9020,1160 h60; Top Overlay "<35R" at 9020,560 h60; Top Overlay "Gold" at 9020.01,430 h60; Top Overlay "green" at 9020,800 h60; Top Overlay "white" at 9020,670 h60; Top Overlay "0.75%" at 9020,920 h60; Top Overlay "FR-4" at 9020,1040 h60; Top Overlay "5. GOLD THICKNESS" at 7859.99,1150 h60; Top Overlay "4. COPPER THICKNESS" at 7859.99,1270 h60; Top Overlay "TITLE :" at 7860.01,2759.99 h60; Top Overlay "DUSUN ELECTRON CO.;LTD" at 8201.36,2601.43 h100; Top Overlay "B45160514D" at 8318.99,2186.02 h100; Top Overlay "MODE :" at 8320,2370 h60; Top Overlay "Drawn By: mei" at 7860.01,1959.99 h78.74; Top Overlay "DATE: 2016.12.14" at 9120,1959.98 h78.74; Top Overlay "NOTE:ONLESS OTHERWISE SPECIFIED" at 7860,1750 h60; Top Overlay "1. SPEC IPC-2221 AND IPC-2222" at 7860,1620 h60; Top Overlay "2. LAYERS" at 7859.99,1510 h60; Top Overlay "3. PCB THICKNESS" at 7859.99,1390 h60; Top Overlay "6. PCB MATIREL" at 7859.99,1030 h60; Top Overlay "7. TWIST AND ROW" at 7859.99,910 h60; Top Overlay "8. SOLDERMASK" at 7859.99,790 h60; Top Overlay "9. SILKSCREEN" at 7859.99,670 h60; Top Overlay "10. SQUARE RESISTANCE" at 7859.99,550 h60; Top Overlay "11. FINISHED" at 7859.99,430 h60
LED1: Top Overlay "+" at 802,843 h40 r180
LED2: Top Overlay "+" at 802,779 h40 r180